# Altium PCB ESP32-S3-USBC-v1.PcbDoc (part 2 of 2)
Units mil, origin at the board's own origin, x right, y up, seen from the top; angles counter-clockwise.
Board outline 2700 x 1000 mil, 4 copper layers (L1, L2, L3, L4), stack 61.583 mil thick; 64 components, 73 nets, 299 pads, 162 vias.
Unrouted connection lines stored in the file: 4.
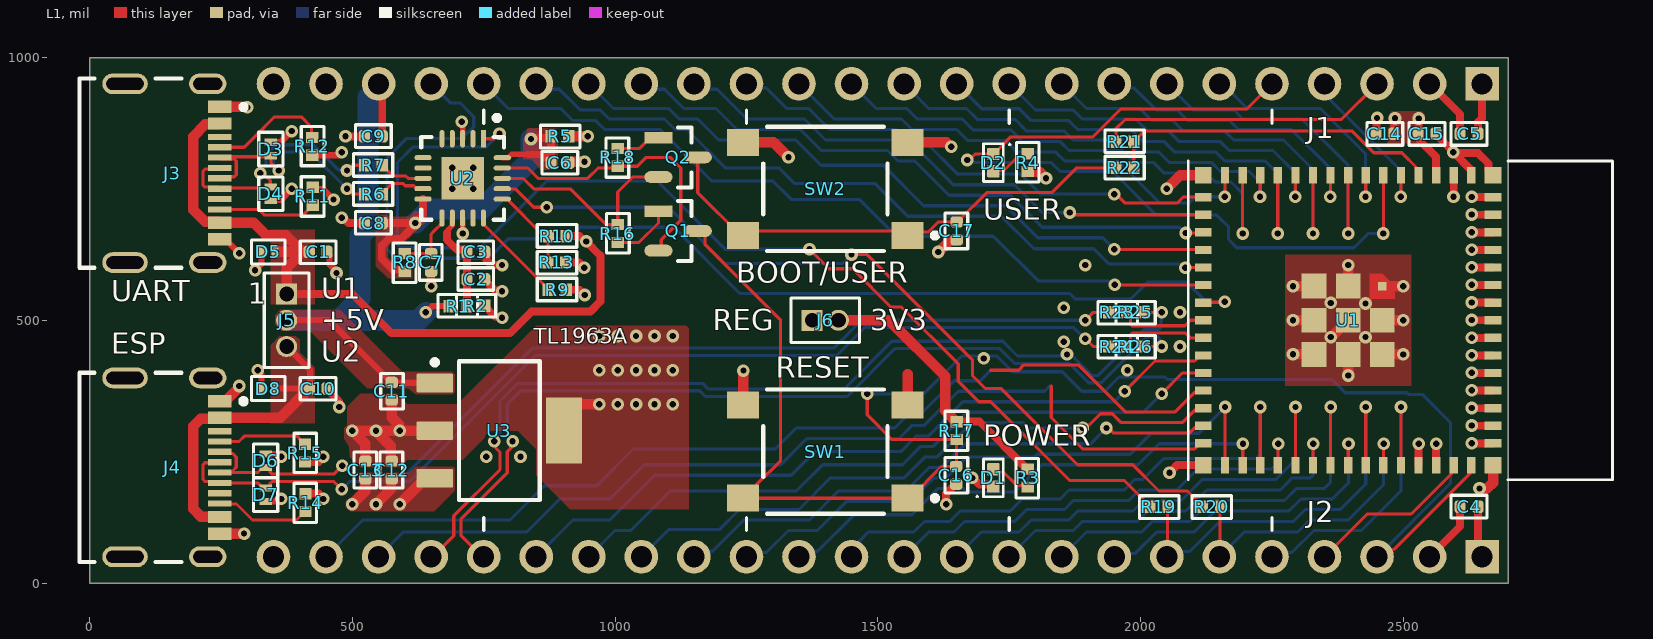
[diagram p0: L1 view]

## Via types
v1: diameter 24, hole 12, L1 to L4, tented both sides, 162 vias

## Nets (pads, with @x,y where several pads share a name; then routed paths per layer and width w, separated by ;. In a path a pad name is that pad's centre, name@x,y a point inside that pad or via, vN(x,y) a via of type N, cw(c..) or ccw(c..) an arc to the next point about the centre after c; other vN are vias at no path point) (continued)
+3V3_REG: (continued)
  L2 w40: v1(545,150) v1(590,150) ; 1355,437 1375,457 J6.1
  L2 w60: v1(590,150) 993.54,150 1195.79,352.25 1265.79,352.25 1266.54,353 1271,353 1355,437
+5V: C9.1 C11.2 J1.22 J5.2 R1.1 U3.1 | length 1236.2
  L1 w12: J5.2 455.75,500 573.82,381.93 C11.2 575.69,381.24 656.28,381.24 U3.1 ; v1(640,515) 652,527 R1.1
  L1 w15: J1.22 556.93,943.07 C9.1
  L4 w40: J5.2 460,500 473.4,500 ; J1.22 550,943.51 530,923.51 530,675.4 515,660.4 515,541.6 473.4,500 ; v1(640,515) 625,500 473.4,500
+5V_VBUS1: C1.1 D5.2 J3.A4B9 J3.B4A9 J5.1 R10.2 | length 1412.2
  L1 w15: J5.1 500,550 574.5,475.5 800,475.5 841.36,516.86 953.14,516.86 972.06,535.78 972.06,622.94 v1(945,650) 942.56,650 932.56,660 R10.2
  L1 w20: J3.A4B9 245.83,872.6 220.25,872.6 196.97,849.32 196.97,710.52 220.25,687.24 245.83,687.24 J3.B4A9 312.29,685.43 335.91,661.81 373.19,661.81 405,630 ; 360,630 405,630 ; J5.1 375,600 405,630 ; C1.1 405,630
+5V_VBUS2: C10.1 D8.2 J4.A4B9 J4.B4A9 J5.3 | length 630.2
  L1 w12: D8.2 C10.1 420,371.93 420,405 J5.3
  L1 w20: J4.B4A9 246.68,126.54 211.72,126.54 196.97,141.29 196.97,298.01 211.72,312.76 245.83,312.76 J4.A4B9 305,314.57 362.64,314.57 416.26,368.19 417.44,368.19 418.07,368.82 C10.1
+VCC_FTDI: C2.2 C3.1 R1.2 R2.2 U2.12 | length 187.4
  L1 w10.01: 680.11,670 690.32,680.2 U2.12
  L1 w15: 679.87,666.04 679.87,653.41 698.97,634.31 C3.1@714.94,634.31 ; R1.2 C2.2@718.04,577.97 ; C2.2 C3.1
BTN_GPIO0: C17.1 Q2.3 R22.1 SW2.1 SW2.2 | length 957
  L1 w6: Q2.3 1157.42,742.58 1238.58,661.42 SW2.2 1252.09,670 1547.91,670 SW2.1 1563.07,668 1596.15,668 1615.08,686.93 C17.1 1651.18,686.93 1707.25,743 1831.18,743 1878.18,790 R22.1
CHIP_PU: C16.2 J2.3 Q1.3 R17.1 SW1.1 SW1.2 U1.45 | length 3104.7
  L1 w6: Q1.3 1165.48,670 1171.26,664.21 1171.26,643.74 1315,500 1315,232.91 1269.02,186.93 1269.02,182.01 SW1.2@1248.43,161.42 ; SW1.2 SW1.2@1248.43,161.42 ; v1(1480,360) 1480,320 1527.01,272.99 R17.1 1649.5,272.49 1649.5,222.43 C16.2 1621.93,221.93 1561.42,161.42 SW1.1 SW1.2@1248.43,161.42 ; J2.3 2464.61,50 2478.67,64.06 2482.41,64.06 2626.42,208.06 2626.42,221.54 U1.45
  L4 w6: v1(1480,360) 1587.53,360 1659.53,432 1726.18,432 1756.18,402 1851.18,402 1888.18,365 1931.82,365 1958.82,392 2046.18,392 2051.18,387 2364.78,387 2389.78,362 2506.66,362 2509.66,359 2536,359 2589.8,305.2 2589.8,189.8 J2.3
CON1_USB_N: D3.2 J3.A7 J3.B7 R6.1 | length 469.2
  L1 w6.03: J3.A7 250.53,772.97 275.76,772.97 279.29,776.5 279.29,803.03 275.76,806.56 250.53,806.56 J3.B7 249.41,811.22 343.23,811.22 D3.2 345,800 v1(360,785) ; v1(490,750) 500,740 R6.1
  L4 w6.03: v1(360,785) 360,789.86 357.17,789.86 349.51,797.52 349.51,808.7 360.89,820.08 419.92,820.08 v1(490,750)
CON1_USB_P: D4.2 J3.A6 J3.B6 R7.1 | length 478.9
  L1 w6.03: J3.A6 245.75,787.88 220.25,787.88 215.99,783.62 215.99,756.82 219.52,753.28 244.75,753.28 J3.B6 249.23,751.99 343.41,751.99 D4.2 344.01,754.57 344.01,765.99 v1@334.75,775.25 ; v1(490,785) 500,795 R7.1
  L4 w6.03: v1(325,780) 325,782.03 335.49,792.52 335.49,814.51 355.08,834.11 425.73,834.11 473.57,786.27 488.73,786.27 v1(490,785)
CON2_USB_N: D6.2 J4.A7 J4.B7 R23.2 | length 1913.8
  L1 w6.03: J4.B7 250.53,246.72 272.14,246.72 279.29,239.56 279.29,220.28 272.14,213.13 ; J4.A7@250.53,213.13 J4.A7 320.32,210.24 330.08,220 D6.2 339.92,220 343.8,216.13 343.8,210.84 347.33,207.31 465,207.31 v1(480.7,223.01) ; v1(1895,500) 1910,515 R23.2
  L4 w6.03: v1(480.7,223.01) 496.7,207 602.32,207 842.3,446.99 1415.85,446.99 1468.86,500 v1(1895,500)
CON2_USB_P: D7.2 J4.A6 J4.B6 R24.2 | length 1948.1
  L1 w6.03: J4.A6@230.91,228.77 219.52,228.77 215.99,225.23 215.99,196.97 219.52,193.44 244.75,193.44 J4.B6 320.12,190.55 330.08,180.59 D7.2 339.92,180.59 343.8,184.47 343.8,189.75 347.33,193.28 465,193.28 v1(480,178.28) ; v1(1895,465) 1910,450 R24.2
  L1 w6.23: J4.A6@230.91,229.92 J4.A6
  L4 w6.03: v1(480,178.28) 494.69,192.97 608.13,192.97 848.11,432.95 1421.66,432.95 1474.67,485.97 1872.7,485.97 1893.67,465 v1(1895,465)
CON_ESP_USB_N: J2.21 R25.1 | length 1802.1
  L1 w6.03: J2.21 652.99,50 692.99,90 692.99,127.83 780.97,215.81 780.97,249.03 773.44,256.56 773.44,266.56 v1(770,270) ; R25.1 v1(2040,515)
  L4 w6.03: v1(770,270) 770,274.03 780.97,285 780.97,345.97 814.92,379.92 1166.7,379.92 1177.59,369.03 1435.74,369.03 1526.75,460.05 1737.8,460.05 1765.8,432.05 1870,432.05 1907,395.05 1919.37,395.05 2006.81,482.49 2035.12,482.49 2038.65,486.02 2038.65,498.16 2040,499.51 v1(2040,515)
CON_ESP_USB_P: J2.20 R26.1 | length 1762.4
  L1 w6.03: J2.20 747.01,50 707.01,90 707.01,122.01 795,210 795,250 801.56,256.56 801.56,266.56 v1(805,270) ; R26.1 v1(2040,450)
  L4 w6.03: v1(805,270) 805,274.86 795,284.86 795,340.16 820.73,365.89 1160.89,365.89 1171.78,355 1441.55,355 1532.57,446.01 1731.99,446.01 1759.99,418.01 1864.19,418.01 1901.19,381.01 1925.18,381.01 2012.63,468.46 2032.26,468.46 2036.56,464.16 2036.56,453.44 v1(2040,450)
CON_GPIO0: J1.3 R21.1 | length 556.7
  L1 w6: R21.1 1952.99,864.14 1970.85,882 2382,882 J1.3
DTR_FTDI: Q2.2 R16.1 U2.18 | length 395.9
  L1 w6: U2.18@796.94,769.77 816.94,769.77 817.03,769.68 825.32,769.68 827.03,767.97 845,750 915,750 982.99,682.01 R16.1 1005,744.14 1033.46,772.6 Q2.2
ESP_USB_N: R23.1 R25.2 U1.23 | length 179.5
  L1 w6.03: R23.1@1979.89,508.1 R23.1 1980.61,507.39 1980.61,493.05 1984.14,489.51 2084.44,489.51 2094.93,500 U1.23
ESP_USB_P: R24.1 R26.2 U1.24 | length 174.7
  L1 w6.03: R24.1 1980.61,457.61 1980.61,471.95 1984.14,475.49 2085.56,475.49 2094.51,466.54 U1.24 ; U1.24@2111.57,466.54 U1.24@2115.51,462.6
FTDI_RESET: C7.1 R8.2 U2.11 | length 127.1
  L1 w6: R8.2 R8.2 649.96,626.97 C7.1 650,664.16 655.84,670 668.89,683.06 670.4,683.06 670.63,683.28 U2.11
FTDI_USB_N: R6.2 U2.9 | length 101.7
  L1 w6.03: R6.2@564.62,747.61 R6.2 557.01,741.18 576.31,760.49 595.86,760.49 600.37,755.97 616.67,755.97 622.32,750.32 U2.9
FTDI_USB_P: R7.2 U2.8 | length 88.6
  L1 w6.03: R7.2 557.01,793.82 564.62,786.2 565.8,786.2 577.49,774.51 590,774.51 601.67,774.51 606.18,770 U2.8
GND: C1.2 C2.1 C3.2 C4.2 C5.2 C6.2 C7.2 C8.2 C9.2 C10.2 C11.1 C12.1 C13.1 C14.1 C15.2 C16.1 C17.2 D1.1 D3.1 D4.1 D5.1 D6.1 D7.1 D8.1 J1.1 J1.23 J2.2 J2.24 J3.A1B12 J3.B1A12 J3.S1 J3.S2 J3.S3 J3.S4 J4.A1B12 J4.B1A12 J4.S1 J4.S2 J4.S3 J4.S4 R9.2 R11.2 R12.2 R13.1 R14.2 R15.2 SW1.3 SW1.4 SW2.3 SW2.4 U1.1 U1.2 U1.42 U1.43 U1.46 U1.47 U1.48 U1.49 U1.50 U1.51 U1.52 U1.53 U1.54 U1.55 U1.56 U1.57 U1.58 U1.59 U1.60 U1.61 U1.62 U1.63 U1.64 U1.65 U1.66 U1.67 U1.68 U1.69 U1.70 U1.71 U1.72 U1.73 U2.3 U2.13 U2.21 U3.2 U3.4 | length 3764.2
  L1 w10.01: v1(708,878) 710,876 U2.3 ; v1(710,665) U2.13
  L1 w12: J3.B1A12 258.46,653.94 v1(285,627.4) v1@285,625 ; v1(315,595) 327.2,607.2 D5.1 ; v1(320,405) 327.2,397.8 D8.1 ; D7.1 335.89,155.89 360.89,155.89 v1(365,160) ; D6.1 359.41,245.59 v1(365,240) ; D4.1 345.89,728.88 363.88,728.88 v1(385,750) ; D3.1 345.79,839.37 364.37,839.37 v1(385,860) ; R12.2 474,814 v1(480,820) ; R11.2 428.96,749.04 444.94,749.04 v1(464.35,729.63) ; C1.2 451.93,628.82 456.56,624.19 456.56,606.69 470,593.25 v1(470,590)
  L1 w15: R15.2 436.21,230 445,238.79 v1(445,240) ; R14.2 436.21,170.01 445,161.22 v1(445,160) ; C10.2 451.93,368.82 475,345.75 v1(475,335) ; v1(480,695) 482.44,695 492.44,685 C8.2 ; v1(487,850) C9.2 ; v1(650,565) C7.2 ; C2.1 755.06,574.87 755.06,573.69 772.03,556.72 783.28,556.72 v1(785,555) ; C3.2 755.06,626.87 755.06,614.94 765,605 v1(785,605) ; R13.1 931.56,610 v1(941.56,600) ; R9.2 932.56,558 v1(942.56,548) ; v1(1630,150) 1630,170.25 1647.82,188.07 C16.1 ; v1(1680,200) 1680.51,200 1693.29,187.22 1716.44,187.22 D1.1 ; v1@2060,215 2069.41,224.41 U1.64 ; C14.1 2449.04,855.96 2449.04,884.04 v1(2450,885) ; U1.42 v1@2528.9,264.57 ; J2.2 2608.07,108.07 C4.2 ; C15.2 2561.93,853.82 2595,820.75 v1(2595,820) ; U1.43 v1@2562.36,264.57 ; v1@2595.83,735.43 U1.2 ; U1.1 2628.92,775.96 2628.92,786.08 v1(2595,820) ; v1@2630.47,265.75 U1.46 ; v1@2630.47,299.21 U1.47 ; v1@2630.47,332.68 U1.48 ; v1@2630.47,366.14 U1.49 ; v1@2630.47,399.61 U1.50 ; v1@2630.47,433.07 U1.51 ; v1@2630.47,466.54 U1.52 ; v1@2630.47,500 U1.53 ; v1@2630.47,533.46 U1.54 ; v1@2630.47,566.93 U1.55 ; v1@2630.47,600.39 U1.56 ; v1@2630.47,633.86 U1.57 ; v1@2630.47,667.32 U1.58 ; v1@2630.47,700.79 U1.59 ; v1@2630.47,734.25 U1.60 ; C5.2@2641.93,856.18 2641.93,876.96 2650,885.03 J1.1 ; U1.62 2662.38,783.84 2662.38,797.62 2641.72,818.28 2596.72,818.28 v1(2595,820)
  L1 w20: J4.B1A12 v1(294.09,94.09) v1@295,95 ; J4.A1B12 258.46,346.06 285,372.6 v1(285,375) ; J3.A1B12 299.09,905.91 v1(300,905) ; C13.1 525,265 v1(500,290) v1(545,290) ; C12.1 573.82,231.93 573.19,232.56 573.19,260.73 545,288.92 v1(545,290) ; C11.1 575,315 589.23,300.77 589.23,290.77 v1(590,290) ; U3.2 v1(590,290) ; U3.4 903.03,315.55 927.48,340 v1(970,340) ; C6.2 911.93,801.18 912.56,801.81 v1(941.81,801.81) ; SW1.4 1243.5,403.5 v1(1244.25,404.25) v1@1245,405 ; SW2.4 1301.42,838.58 v1(1330,810) ; SW1.3 1556.5,397.42 ; SW2.3 1630.33,838.58 1638.92,830 v1(1640,830) ; v1@1615.77,630.77 1637.44,652.44 1649.37,652.44 C17.2 ; v1(2050,750) 2075.59,775.59 U1.63 ; v1(2290,565) v1(2290,565) U1.71 ; v1@2290.04,435.04 U1.73 ; v1(2290,500.04) U1.72 ; v1(2362,468) 2363.04,468 U1.61 ; v1(2395,394.96) U1.70 ; U1.69 v1@2395.04,605 ; U1.68 v1@2500.04,435.04 ; U1.67 v1@2500.04,500 ; U1.66 v1@2500.04,564.96 ; v1(2645,180) 2660,180 2670.63,190.63 U1.65 ; v1(545,290) v1(590,290)
  other v1: 2055,210 755,240 820,240 2529.33,265 2562.8,265 2630.04,266.18 2630.04,299.65 2630.04,333.11 1005,340 1040,340 1075,340 1110,340 2630.04,366.57 2630.04,400.04 970,405 1005,405 1040,405 1075,405 1110,405 1701.5,427.42 2630.04,433.5 2290,435.08 2500.08,435 2075,450 1854,459 2630.04,466.97 2428,468 970,470 1005,470 1040,470 1075,470 1110,470 2500.08,499.96 2630.04,500.43 2075,515 1854,524 2428,532 2362,533 2630.04,533.9 2500.08,564.92 2630.04,567.36 2630.04,600.83 1895,605 2395.08,605.04 1615,630 2630.04,634.29 2630.04,667.76 2630.04,701.22 2595.39,735 2630.04,734.69 690,750 730,750 690,790 730,790
GPIO0: R21.2 R22.2 U1.4 | length 642.5
  L1 w6: R22.2 1987.01,841.18 1992.64,846.81 1993.82,846.81 2007.01,860 2402.72,860 2443.94,818.78 2497.08,818.78 2526.02,789.84 2526.02,778.46 U1.4
GPIO1: J1.4 U1.5 | length 315.8
  L1 w6: v1(2495,735) 2495.43,735.43 U1.5
  L4 w6: J1.4 2360.33,939.67 2360.33,919.67 2495,785 v1(2495,735)
GPIO2: D2.1 J1.5 U1.6 | length 1637
  L1 w6: v1(1670,805) 1673.79,805 1685.13,816.34 D2.1 1720.39,816.34 1753.06,849 1909.57,849 1962.57,902 2202,902 J1.5 ; v1(2461.97,665.04) U1.6
  L4 w6: v1(1670,805) 1672.68,802.32 1680.54,802.32 1682.86,800 1830.29,800 1847.3,783 1947,783 2030,700 2145,700 2167.21,677.79 2167.21,653.82 2183.03,638 2207,638 2406.18,638 2433.22,665.04 v1(2461.97,665.04)
GPIO3: J1.6 U1.7 | length 455.2
  L1 w6: v1@2428.43,735.43 U1.7@2428.43,775.59
  L4 w6: J1.6 2156,950 2203,903 2342,903 2428,817 v1(2428,735)
GPIO4: J1.7 U1.8 | length 649.8
  L1 w6: v1(2395,665) U1.8 U1.8
  L4 w6: J1.7 2100,900 2177.72,900 2194.72,883 2307,883 2395,795 v1(2395,665)
GPIO5: J1.8 U1.9 | length 571.9
  L1 w6: v1@2361.5,735.43 U1.9@2361.5,775.59
  L4 w6: J1.8 1958.23,941.77 1988.23,941.77 2030,900 2070,900 2090,880 2169.43,880 2186.43,863 2287,863 2361.07,788.93 v1(2361.07,735)
GPIO6: J1.9 U1.10 | length 778.1
  L1 w6: v1(2328.07,665) U1.10
  L4 w6: J1.9 1897,903 1998.72,903 2021.72,880 2061.72,880 2081.72,860 2160,860 2177,843 2272,843 2328.07,786.93 v1(2328.07,665)
GPIO7: J1.10 U1.11 | length 700.2
  L1 w6: v1@2294.57,735.43 U1.11
  L4 w6: J1.10 1800,900 1871.72,900 1888.72,883 1990.43,883 2013.43,860 2053.43,860 2073.43,840 2151.72,840 2168.72,823 2252,823 2294.14,780.86 v1(2294.14,735)
GPIO8: J1.11 U1.12 | length 906.4
  L1 w6: v1(2261.14,665) U1.12@2261.14,775.55
  L4 w6: J1.11 1697.64,902.36 1769.36,902.36 1791.72,880 1863.43,880 1880.43,863 1982,863 2005,840 2045.15,840 2065.15,820 2143.43,820 2160.43,803 2237,803 2261.14,778.86 v1(2261.14,665)
GPIO9: J1.12 U1.13 | length 822.7
  L1 w6: v1@2227.65,735.43 U1.13@2227.65,775.59
  L4 w6: J1.12 1597,903 1668.72,903 1689.36,882.36 1761.07,882.36 1783.43,860 1855.15,860 1872.15,843 1973.72,843 1996.72,820 2035,820 2055,800 2135.15,800 2152.15,783 2207,783 2227.01,762.99 2227.01,735.2 v1(2227.21,735)
GPIO10: J1.13 U1.14 | length 1017.2
  L1 w6: v1(2194.21,665) U1.14@2194.21,775.55
  L4 w6: J1.13 1497,903 1555,903 1575,883 1660.43,883 1681.07,862.36 1752.79,862.36 1775.15,840 1846.86,840 1863.86,823 1965.43,823 1988.43,800 2025,800 2045,780 2125,780 2142,763 2172,763 2194.21,740.79 v1(2194.21,665)
GPIO11: J1.14 U1.15 | length 949.5
  L1 w6: v1@2160.79,735.43 U1.15
  L4 w6: J1.14 1417,883 1545,883 1565,863 1650,863 1670.64,842.36 1742.64,842.36 1765,820 1838.58,820 1855.58,803 1957,803 2037,723 2091.69,723 2103.69,735 v1(2160.35,735)
GPIO12: J1.15 U1.16 | length 968.1
  L1 w6: v1(1950,740) 1953.79,740 1970.79,723 2069.56,723 2080.81,734.25 U1.16
  L4 w6: J1.15 1258.23,941.77 1288.23,941.77 1327,903 1368.72,903 1408.72,863 1535,863 1555,843 1587,843 1652,778 1772,778 1810,740 v1(1950,740)
GPIO13: J1.16 U1.17 | length 1072.7
  L1 w6: v1(1865,705) 1868.79,705 1873,700.79 U1.17
  L4 w6: J1.16 1160.33,939.67 1193.86,939.67 1250.53,883 1360.43,883 1400.43,843 1526.72,843 1546.72,823 1578.72,823 1643.72,758 1760,758 1813,705 v1(1865,705)
GPIO14: J1.17 U1.18 | length 1187.9
  L1 w6: v1(2086.16,666.16) 2118.29,666.16 U1.18
  L4 w6: J1.17 1060.33,939.67 1094.47,939.67 1095,939.14 1095,938.53 1130.53,903 1192,903 1232,863 1352.15,863 1392.15,823 1518.43,823 1538.43,803 1570.43,803 1635.43,738 1751.72,738 1812.72,677 2073.3,677 2084.14,666.16 v1(2086.16,666.16)
GPIO15: J1.18 U1.19 | length 1300.4
  L1 w6: v1(1950,635) 1950.57,634.43 2118.88,634.43 U1.19
  L4 w6: J1.18 997,903 1102.25,903 1122.25,883 1157,883 1197,843 1343.86,843 1391.86,795 1510,795 1587,718 1743.43,718 1804.43,657 1928,657 v1(1950,635)
GPIO16: J1.19 U1.20 | length 1414.6
  L1 w6: v1(2085,600) 2085.2,600.2 2119.25,600.2 U1.20
  L4 w6: J1.19 860.33,939.67 893.86,939.67 933.53,900 971.72,900 988.72,883 1093.96,883 1113.96,863 1137,863 1210,790 1311.82,790 1341.82,760 1495,760 1557,698 1735.15,698 1797.15,636 1910.82,636 1938.82,608 1940,608 1941,607 2074.21,607 2081.21,600 v1(2085,600)
GPIO17: J1.20 U1.21 | length 1528.1
  L1 w6: v1(1950.57,567.5) 1951.14,566.93 U1.21
  L4 w6: J1.20 797,903 897,903 920,880 963.43,880 980.43,863 1085.68,863 1183.68,765 1300,765 1335,730 1465,730 1535,660 1720,660 1805,575 1939.28,575 1946.78,567.5 v1(1950.57,567.5)
GPIO18: J1.21 U1.22 | length 2226.6
  L1 w6: U1.22 2120.22,534.23 2159.23,534.23 v1(2160,535)
  L4 w6: J1.21@660.33,939.67 686.4,913.6 704.93,913.6 731,887.53 731,868.47 708.53,846 603.57,846 566,808.43 566,635.72 583.72,618 759.82,618 796.82,655 911.82,655 933.82,677 1111.43,677 1237.43,551 1865.18,551 1875.68,540.5 1981.5,540.5 2014,573 2087,573 2125,535 v1(2160,535)
GPIO21: J2.19 U1.25 | length 1429.2
  L1 w6: v1(1970,365) 2027.48,422.48 2102.84,422.48 2108.7,428.34 2108.7,430.2 2111.57,433.07 U1.25
  L4 w6: J2.19 920,120 990,120 1075,205 1335,205 1380,250 1543.58,250 1573.58,280 1596.86,280 1661.86,345 1950,345 v1(1970,365)
GPIO26: J2.18 U1.26 | length 1314.3
  L1 w6: v1(2040,360) 2079.61,399.61 U1.26
  L4 w6: J2.18 1000,100 1030,100 1105,175 1345,175 1395,225 1546.86,225 1581.86,260 1605.15,260 1670.15,325 2005,325 v1(2040,360)
GPIO33: J2.17 U1.28 | length 1208.3
  L1 w6: v1(1890,295) 1893.79,295 1899.47,300.68 1902.5,300.68 1923.82,322 1946.18,322 1962.44,305.75 2080,305.75 2104.06,329.8 2116.57,329.8 U1.28
  L4 w6: J2.17 1101.64,101.64 1198.36,101.64 1236.72,140 1350,140 1410,200 1550.15,200 1590.15,240 1613.43,240 1678.43,305 1777.32,305 1787.32,295 v1(1890,295)
GPIO34: J2.16 U1.29 | length 1080.3
  L1 w6: v1(1935,295) 1938.61,295 1947.86,285.75 2093.59,285.75 2104.18,296.34 2116.57,296.34 U1.29
  L4 w6: J2.16 1160.33,60.33 1185.33,60.33 1245,120 1370,120 1425,175 1553.43,175 1598.43,220 1621.72,220 1666.72,265 1905,265 v1(1935,295)
GPIO35: J2.15 U1.31 | length 1139.4
  L1 w6: U1.31 v1(2160.79,334.96)
  L4 w6: J2.15 1258.23,58.23 1288.23,58.23 1330,100 1385,100 1440,155 1561.72,155 1606.72,200 1630,200 1670,240 1798.58,240 1803.58,245 1980,245 2020,285 2110.83,285 v1(2160.79,334.96)
GPIO36: J2.14 U1.32 | length 979.8
  L1 w6: U1.32 v1@2194.32,264.57
  L4 w6: J2.14 1360.33,60.33 1385.33,60.33 1455,130 1565,130 1615,180 1661.82,180 1668.82,173 1759.86,173 1811.86,225 1995,225 2035,265 v1(2194.76,265)
GPIO37: J2.13 U1.33 | length 1068
  L1 w6: U1.33@2227.76,224.45 v1(2227.76,335)
  L4 w6: J2.13 1450,64.61 1465.73,80.35 1465.73,80.73 1482,97 1568.72,97 1588.72,117 1636.72,117 1656.72,137 1752.15,137 1775.15,160 1846.86,160 1863.86,177 1969.11,177 1989.11,197 2003.82,197 2043.82,237 2220,237 2227.76,244.76 v1(2227.76,335)
GPIO38: J2.12 U1.34 | length 861.6
  L1 w6: U1.34@2261.25,224.41 v1@2261.25,264.57
  L4 w6: J2.12 1597,97 1645,97 1665,117 1760.43,117 1783.43,140 1855.15,140 1872.15,157 1977.4,157 1997.4,177 2069.11,177 2109.11,217 2249.01,217 2261.69,229.67 v1(2261.69,265)
GPIO39: J2.11 U1.35 | length 932.2
  L1 w6: U1.35@2294.69,224.45 v1(2294.69,335)
  L4 w6: J2.11 1697,97 1768.72,97 1791.72,120 1863.43,120 1880.43,137 1985.68,137 2005.68,157 2077.4,157 2117.4,197 2257.29,197 2294.69,234.39 v1(2294.69,335)
GPIO40: J2.10 U1.36 | length 742.5
  L1 w6: U1.36@2328.18,224.41 v1@2328.18,264.57
  L4 w6: J2.10 1800,100 1871.72,100 1888.72,117 1993.96,117 2013.96,137 2085.68,137 2125.68,177 2265.58,177 2288.58,200 2322.76,200 2328.61,205.86 v1(2328.61,265)
GPIO41: J2.9 U1.37 | length 824.2
  L1 w6: U1.37 v1(2361.61,335)
  L4 w6: J2.9 1897,97 2002.25,97 2022.25,117 2093.96,117 2133.96,157 2273.86,157 2296.86,180 2350,180 2361.61,191.61 v1(2361.61,335)
GPIO42: J2.8 U1.38 | length 618.4
  L1 w6: U1.38@2395.11,224.41 v1@2395.11,264.57
  L4 w6: J2.8 1956.47,56.47 1990,56.47 2030.53,97 2102.25,97 2142.25,137 2282.15,137 2305.15,160 2365,160 2395.54,190.54 v1(2395.54,265)
GPIO45: J2.5 U1.41 | length 567.5
  L1 w6: U1.41@2495.47,224.45 v1(2495.47,335)
  L4 w6: J2.5 2258.23,58.23 2288.23,58.23 2330,100 2420,100 2495.47,175.47 v1(2495.47,335)
GPIO46: J2.4 U1.44 | length 325.1
  L1 w6: J2.4 2431.39,131.39 2514.89,131.39 2592.95,209.46 2592.95,221.54 U1.44
GPIO47: J2.23 U1.27 | length 1874.3
  L1 w6: 1715,405 1767.86,405 1777.86,415 1881.47,415 1970.72,325.75 2065.75,325.75 2103.27,363.27 2116.57,363.27 U1.27
  L4 w6: J2.23 520,120 800,120 865,185 965,185 1035,255 1305,255 1345,295 1532.01,295 1557.01,320 1580.29,320 1645.29,385 1695,385 1715,405
  other v1: 1860,435
GPIO48: J2.22 U1.30 | length 1794.5
  L1 w6: 1830,375 1830,315 1890,255 2097.33,255 2097.49,255.16 2102.84,255.16 2108.7,261.02 2108.7,262.87 2111.57,265.75 U1.30
  L4 w6: J2.22 597,97 832,97 895,160 990,160 1055,225 1315,225 1365,275 1540.29,275 1565.29,300 1588.58,300 1653.58,365 1817.14,365 1827.14,375 1830,375
  other v1: 1975,405
NetD1_2: D1.2 R3.1 | length 78.8
  L1 w6: D1.2 1725.08,211.26 1738.74,211.26 1764.18,185.82 1782.17,185.82 R3.1
NetD2_2: D2.2 R4.1 | length 80.8
  L1 w6: D2.2 D2.2@1726.06,789.72 ; D2.2@1726.06,785 1740,785 1766.68,811.68 1779.67,811.68 R4.1
NetJ3_A5: J3.A5 R12.1 | length 227
  L1 w6: J3.A5 294.13,829.13 316.46,851.46 352,887 403,887 422.21,867.79 422.21,849.8 R12.1
NetJ3_B5: J3.B5 R11.1 | length 190.5
  L1 w6: J3.B5 322.05,711.02 333.08,700 406.02,700 418.19,712.17 418.19,713.35 423.82,718.98 R11.1
NetJ4_A5: J4.A5 R15.1 | length 174.1
  L1 w6: J4.A5 284.29,269.29 295,280 394.02,280 403.19,270.83 403.19,269.65 408.82,264.02 R15.1
NetJ4_B5: J4.B5 R14.1 | length 182.9
  L1 w6: J4.B5 248.54,150.28 279.72,150.28 310,120 393.83,120 409.82,135.99 R14.1
NetQ1_1: Q1.1 R16.2 | length 115.2
  L1 w6: R16.2 1045.38,647.99 1082.58,685.19 Q1.1
NetQ2_1: Q2.1 R18.2 | length 86
  L1 w6: R18.2 1046.73,827.01 1067.12,847.4 Q2.1
NetR9_1: R9.1 U2.15 | length 187.8
  L1 w6: U2.15 749.37,683.28 867.36,565.29 867.36,563.63 R9.1
NetR10_1: R10.1 R13.2 U2.16 | length 169.3
  L1 w6: U2.16 796.72,730.63 796.94,730.4 796.94,728.06 858.19,666.81 867.36,666.81 872.99,661.18 R10.1 872.49,659.5 872.49,610.5 R13.2
RTS_FTDI: Q1.2 R18.1 U2.19 | length 547.6
  L1 w6: U2.19 820,789.68 833.6,789.68 853.28,770 948.18,770 967.87,789.68 1001.69,789.68 R18.1 1042.09,792.99 1059.09,810 1105,810 1115.71,799.29 1115.71,799.12 1125,789.83 1125,690.17 1087.83,653 1087.83,637.85 Q1.2
RXD_FTDI: R19.2 U2.1 | length 2171.5
  L1 w6: U2.1 770.41,845.41 v1(780,855) ; v1(1370,635) 1407,598 1452,598 1525,525 1545,525 1653.07,416.93 1653.07,383.74 1691.82,345 1715,345 1865,195 1969.17,195 2017.99,146.18 R19.2
  L4 w6: v1(780,855) 755,830 615.86,830 586,800.14 586,644 592,638 743,638 760,655 827.03,722.03 870,765 1080,765 1210,635 v1(1370,635)
TXD_FTDI: R20.2 U2.17 | length 1615.7
  L1 w6: U2.17 785.64,750.09 809.91,750.09 845,715 v1(870,715) ; v1(1450,625) 1480,625 1680,425 1680,395 1705,370 1735,370 1880,225 1985,225 2035,175 2089.17,175 2117.99,146.18 R20.2
  L4 w6: v1(870,715) 1101.72,715 1208.72,608 1433,608 v1(1450,625)
U0RXD: J2.6 R20.1 U1.40 | length 582.9
  L1 w6: J2.6 2151,51 2151,144 R20.1 ; U1.40 v1@2462.04,264.57
  L4 w6: J2.6 2197,97 2298.72,97 2321.72,120 2395,120 2462.47,187.47 v1(2462.47,265)
U0TXD: J2.7 R19.1 U1.39 | length 788.8
  L1 w6: J2.7 2051,51 2051,144 R19.1 ; U1.39 v1(2428.54,335)
  L4 w6: J2.7 2060,60 2093.53,60 2150.53,117 2290.43,117 2313.43,140 2380,140 2428.54,188.54 v1(2428.54,335)
pads on no net: J1.24 J3.A8 J3.B8 J4.A8 J4.B8 U2.2 U2.4 U2.5 U2.6 U2.7 U2.14

## Polygon pours and split planes (outlines as drawn)
GND on L1 "GND_L01_P009" (solid, pour order 9): 1140,140 1140,485 1135,490 850,490 700,340 605,340 585,360 515,360 490,335 490,300 485,295 485,275 494.39,258.84 495,240 510,225 515,220 590,220 605,235 710,235 765,290 815,290 850,255 850,205 915,140
GND on L1 "GND_L01_P008" (solid, pour order 8): 2275,625 2515,625 2515,375 2275,375
+5V_VBUS2 on L1 "+5V_VBUS2_L01_P007" (solid, pour order 7): 345,304 345,452 362,471 392,471 400,463 400,439 429,410 429,304
+5V_VBUS1 on L1 "+5V_VBUS1_L01_P006" (solid, pour order 6): 345,530 429,530 429,672 345,672
+5V on L1 "+5V_L01_P005" (solid, pour order 5): 621,359 691,359 695,363 695,397 690,402 595,402 477,520 363,520 353,510 353,492 365,480 419,480 528,371 606,371 607,370
+3V3_REG on L1 "+3V3_REG_L01_P004" (solid, pour order 4): 488,144 488,155.88 495,162 498,163 514,179 514,189 512,191 512,210 608,210 621,221 692,221 695,218 695,176 656,137 495,137
3V3_FTDI on L1 "3V3_FTDI_L01_P003" (solid, pour order 3): 574,580 575,580 614,580 614,606 581,606 567,620 567,637 573,648 598.5,648 640.87,687.42 642,701 631,707 618,707 608,697 569,697 565,701 549,701 545,697 545,603 568,580
3V3_FTDI on L1 "3V3_FTDI_L01_P001" (solid, pour order 1): 887,865 891,861 891,787 858.22,786.04 841.5,805.92 825.14,805.92 825.14,843.47 833.58,865
+3V3 on L1 "+3V3_L01_P000" (solid, pour order 0): 2470,837 2540,837 2540,864 2537,867 2537,874 2541,878 2541,891 2534,898 2478,898 2472,890 2472,878 2474,875 2474,868 2470,864
GND on L2 "GND_L02_P012" (solid, pour order 12): 20,25 2685,25 2685,980 20,980
+3V3_REG on L2 "+3V3_REG_L02_P011" (solid, pour order 11): 483.79,154.76 518.5,180 595,180 600,175 600,125 595.06,120.06 483.79,120.06
+3V3 on L2 "+3V3_L02_P010" (solid, pour order 10): 2685,20 2685,985 910,985 910,830 920,820 1215,820 1355,680 1490,680 1490,630 1405,545 1405,480 1450,480 1450,505 1680,735 1830,735 1835,730 1885,780 2505,780 2515,770 2515,575 2580,510 2560.73,490.73 2563.06,383.73 2560,295.42 2565.09,290.75 2565.07,238.71 2560,235 2495,170 2355,170 2355,95 2390,60 2390,20
GND on L3 (split plane): 2699.95,0.05 0.05,0.05 0.05,999.95 2699.95,999.95

## Silkscreen, mask and mechanical layers (free items; w line width, h text height)
Top Overlay:
  lines w6: 750,100 750,125 ; 750,875 750,900 ; 1250,100 1250,125 ; 1250,875 1250,900 ; 1750,100 1750,125 ; 1750,875 1750,900 ; 2250,100 2250,125 ; 2250,875 2250,900
  text "J1" at 2316,846 h40
  text "USER" at 1701,691 h40
  text "BOOT/USER" at 1231,571 h40
  text "U1" at 441,541 h40
  text "UART" at 41,536 h40
  text "+5V" at 441,481 h40
  text "REG" at 1186,481 h40
  text "3V3" at 1486,481 h40
  text "TL1963A" at 845,455 h30
  text "ESP" at 41,436 h40
  text "U2" at 441,421 h40
  text "RESET" at 1306,391 h40
  text "POWER" at 1701,261 h40
  text "J2" at 2316,116 h40
Bottom Overlay:
  drawing of 21 lines, arcs and shapes, not listed
  text "IO24" at 369,879 h40 r90
  text "GND" at 469,879 h40 r90
  text "5V" at 569,879 h40 r90
  text "IO18" at 669,879 h40 r90
  text "IO17" at 769,879 h40 r90
  text "IO16" at 869,879 h40 r90
  text "IO15" at 969,879 h40 r90
  text "IO14" at 1069,879 h40 r90
  text "IO13" at 1169,879 h40 r90
  text "IO12" at 1269,879 h40 r90
  text "IO11" at 1369,879 h40 r90
  text "IO10" at 1469,879 h40 r90
  text "IO9" at 1569,879 h40 r90
  text "IO8" at 1669,879 h40 r90
  text "IO7" at 1769,879 h40 r90
  text "IO6" at 1869,879 h40 r90
  text "IO5" at 1969,879 h40 r90
  text "IO4" at 2069,879 h40 r90
  text "IO3" at 2169,879 h40 r90
  text "IO2" at 2269,879 h40 r90
  text "IO1" at 2369,879 h40 r90
  text "IO0" at 2469,879 h40 r90
  text "3V3" at 2569,879 h40 r90
  text "GND" at 2669,879 h40 r90
  text "ESP32-Dual-USBC" at 2159,481 h40
  text "(C) 2026" at 2034,391 h40
  text "GND" at 369,259 h40 r90
  text "IO47" at 469,259 h40 r90
  text "IO48" at 569,259 h40 r90
  text "USB-" at 669,259 h40 r90
  text "USB+" at 769,259 h40 r90
  text "IO21" at 869,259 h40 r90
  text "IO26" at 969,259 h40 r90
  text "IO33" at 1069,259 h40 r90
  text "IO34" at 1169,259 h40 r90
  text "IO35" at 1269,259 h40 r90
  text "IO36" at 1369,259 h40 r90
  text "IO37" at 1469,259 h40 r90
  text "IO38" at 1569,259 h40 r90
  text "IO39" at 1669,259 h40 r90
  text "IO40" at 1769,259 h40 r90
  text "IO41" at 1869,259 h40 r90
  text "IO42" at 1969,259 h40 r90
  text "TXD" at 2069,259 h40 r90
  text "RXD" at 2169,259 h40 r90
  text "IO45" at 2269,259 h40 r90
  text "IO46" at 2369,259 h40 r90
  text "EN" at 2469,259 h40 r90
  text "GND" at 2569,259 h40 r90
  text "3V3" at 2669,259 h40 r90
Board Shape:
  the board outline again, w20

## Text inside footprints (layer, text, board x,y; h text height)
J5: Top Overlay "1" at 301,531 h40